# Altium PCB LEDSW.PcbDoc
Units mm, origin at the board's own origin, x right, y up, seen from the top; angles counter-clockwise.
Board outline 161.8 x 25.65 mm, 2 copper layers (Top Layer, Top, Bottom Layer, Bottom); 39 components, 23 nets, 73 pads, 0 vias.
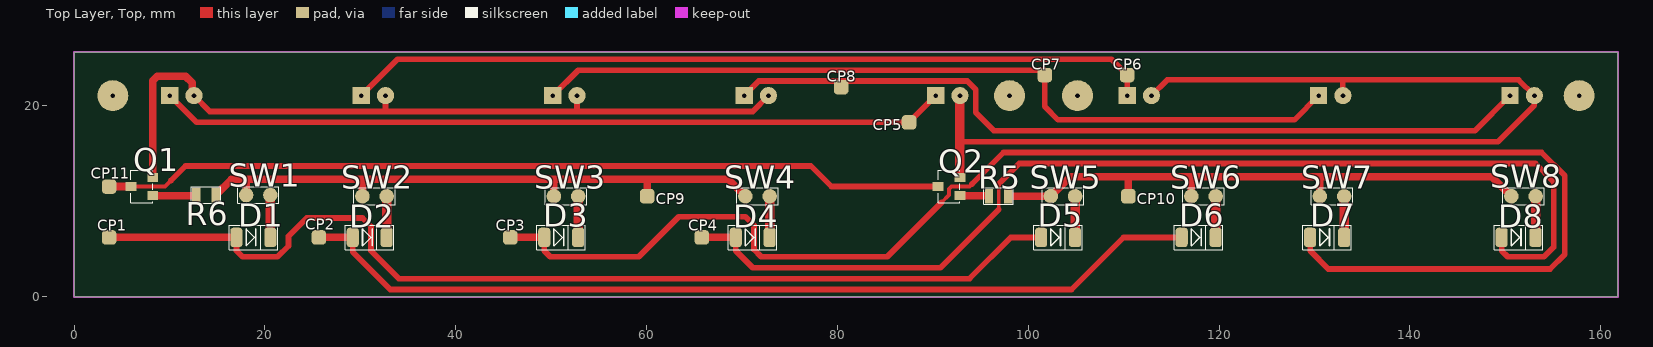
[diagram p0: Top Layer, Top view]
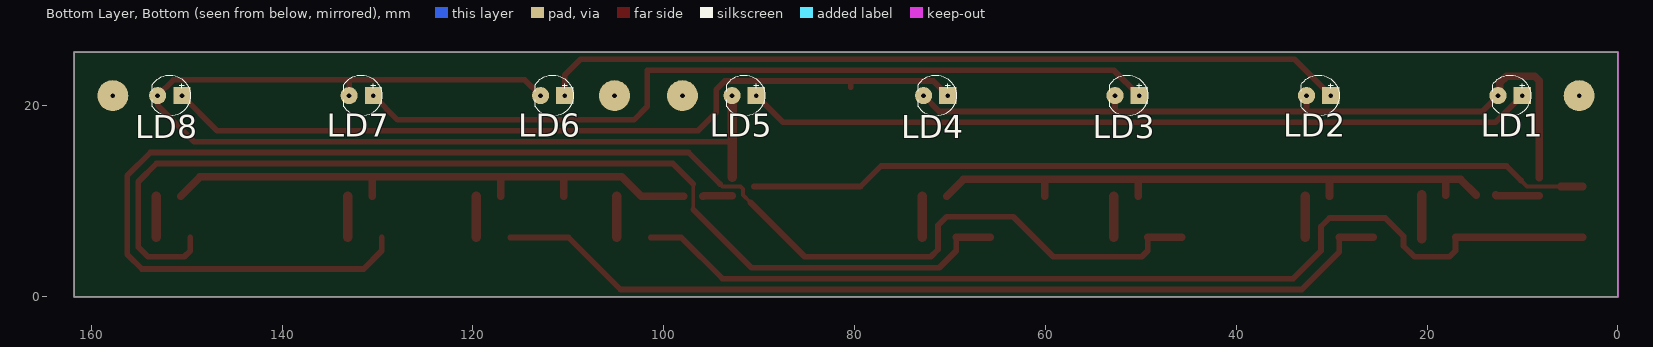
[diagram p1: Bottom Layer, Bottom view, seen from below]

## Layer stack, top to bottom
Top Solder, Top Mask: solder mask 0.0102, Solder Resist, Dk 3.5
Top Layer, Top: signal copper 0.0356
Dielectric 1: dielectric 0.32, FR-4, Dk 4.8
Bottom Layer, Bottom: signal copper 0.0356
Bottom Solder, Bot Mask: solder mask 0.0102, Solder Resist, Dk 3.5

## Board outline
0,0 161.798,0 161.798,25.654 0,25.654

## Design rules (kind name [scope] priority, off if disabled: settings)
Clearance "Clearance_Top Layer, Top" [ExistsOnLayer('Top Layer, Top') vs ExistsOnLayer('Top Layer, Top')] p1: gap=0.15 ignorepadtopadclearanceinfootprint=FALSE except(0.2: THPad-THPad)
Clearance [All] p2: gap=0.254 ignorepadtopadclearanceinfootprint=FALSE except(0: Arc-Hole Track-Hole SMDPad-Hole THPad-Hole Via-Hole Fill-Hole Poly-Hole Region-Hole Text-Hole; 0.15: THPad-THPad; 0.2: Arc-Arc Arc-Track Arc-THPad Arc-Via Track-Track Track-THPad Track-Via THPad-Via Via-Via)
HoleSize [All] p1: absolutevalues=TRUE maxlimit=5 minlimit=0.025 maxpercent=80.000 minpercent=20.000
MinimumSolderMaskSliver [All] p1: minsoldermaskwidth=0
PlaneClearance [All] p1: clearance=0.254
PolygonConnect [All] p1: connectstyle=Relief reliefconductorwidth=0.254 reliefentries=4 polygonreliefangle="90 Angle" airgapwidth=0.254
RoutingVias [All] p1: holewidth=0.711 width=1.27 viastyle="Through Hole" minholewidth=0.711 minwidth=1.27 maxholewidth=0.711 maxwidth=1.27
SilkToSilkClearance [All] p1: silktosilkclearance=0
SilkToSolderMaskClearance [IsPad] p1: minsilkscreentomaskgap=0 clearancetoexposedcopper=TRUE
SolderMaskExpansion [All] p1: expansion=0.102 istentingtop=FALSE
Width [All] p1: maxlimit=3 minlimit=0.254 preferedwidth=0.5
25 further rules are at their usual default settings.

## Components (designator, comment, footprint, x,y, rotation, side; value= is the part's Value field where it differs from the comment)
CP1 "R1" PAD_RRX60Y60D0T 3.683,6.223 r0 top
CP2 "R2" PAD_RRX60Y60D0T 25.654,6.223 r0 top
CP3 "R3" PAD_RRX60Y60D0T 45.72,6.223 r0 top
CP4 "R4" PAD_RRX60Y60D0T 65.786,6.223 r0 top
CP5 "SWL1" PAD_RRX60Y60D0T 87.503,18.288 r0 top
CP6 "SWL2" PAD_RRX60Y60D0T 110.363,23.241 r0 top
CP7 "SWL3" PAD_RRX60Y60D0T 101.727,23.241 r0 top
CP8 "SWL4" PAD_RRX60Y60D0T 80.391,21.971 r0 top
CP9 "C1" PAD_RRX60Y60D0T 60.071,10.541 r0 top
CP10 "C2" PAD_RRX60Y60D0T 110.49,10.541 r0 top
CP11 "GND" PAD_RRX60Y60D0T 3.683,11.557 r0 top
D1 "" SOD80_1N4148(Primary) 18.923,6.223 r0 top
D2 "" SOD80_1N4148(Primary) 31.115,6.223 r0 top
D3 "" SOD80_1N4148(Primary) 51.181,6.223 r0 top
D4 "" SOD80_1N4148(Primary) 71.247,6.223 r0 top
D5 "" SOD80_1N4148(Primary) 103.251,6.223 r0 top
D6 "" SOD80_1N4148(Primary) 117.983,6.223 r0 top
D7 "" SOD80_1N4148(Primary) 131.445,6.223 r0 top
D8 "" SOD80_1N4148(Primary) 151.511,6.223 r0 top
LD1 "" LED_3MM_DIP_LED_3MM(Primary) 11.303,21.082 r0 bottom locked
LD2 "" LED_3MM_DIP_LED_3MM(Primary) 31.369,21.082 r0 bottom locked
LD3 "" LED_3MM_DIP_LED_3MM(Primary) 51.435,21.082 r0 bottom locked
LD4 "" LED_3MM_DIP_LED_3MM(Primary) 71.501,21.082 r0 bottom locked
LD5 "" LED_3MM_DIP_LED_3MM(Primary) 91.567,21.082 r0 bottom locked
LD6 "" LED_3MM_DIP_LED_3MM(Primary) 111.633,21.082 r0 bottom locked
LD7 "" LED_3MM_DIP_LED_3MM(Primary) 131.699,21.082 r0 bottom locked
LD8 "" LED_3MM_DIP_LED_3MM(Primary) 151.765,21.082 r0 bottom locked
Q1 "" SOT23 7.112,11.557 r90 top
Q2 "" SOT23 91.694,11.557 r90 top
R5 "5.1K" R0805 96.901,10.541 r180 top
R6 "5.1K" R0805 13.843,10.668 r180 top
SW1 "" 2P:EX60Y60D0T-CD100 19.304,10.668 r180 top
SW2 "" 2P:EX60Y60D0T-CD100 31.496,10.541 r180 top
SW3 "" 2P:EX60Y60D0T-CD100 51.562,10.541 r180 top
SW4 "" 2P:EX60Y60D0T-CD100 71.628,10.541 r180 top
SW5 "" 2P:EX60Y60D0T-CD100 103.632,10.541 r180 top
SW6 "" 2P:EX60Y60D0T-CD100 118.364,10.541 r180 top
SW7 "" 2P:EX60Y60D0T-CD100 131.826,10.541 r180 top
SW8 "" 2P:EX60Y60D0T-CD100 151.892,10.541 r180 top

## Footprints (in the part's own frame and the unit in brackets; to place one, negate y for a bottom-side part, rotate by r counter-clockwise, add the part's x,y. Pads: shape width x height; smd on the part's side, far side on the other; paste and mask are expansions set on the pad)
2P:EX60Y60D0T-CD100 [mil]
  round 60 smd: 1(-50,0) 2(50,0)
  silkscreen extent -85,-35 85,35
LED_3MM_DIP_LED_3MM(Primary) [mm]
  rect 1.8x1.8 hole 0.5: A(-1.27,0)
  round 1.8 hole 0.5: K(1.27,0)
  silkscreen extent -2.16,-2.16 1.84,2.16
PAD_RRX60Y60D0T [mil]
  rrect50% 60x60 smd: 1(0,0)
R0805 [mil]
  rect 35x60 smd: 1(-40,0) 2(40,0)
  silkscreen extent -61,-34 61,34
SOD80_1N4148(Primary) [mil]
  rrect50% 50x80 smd: A(-75,0) K(65,0)
  silkscreen extent -105,-50 95,50
SOT23 [mil]
  rect 38x45 smd: 1(-37.5,-45) 2(37.5,-45) 3(0,45)
  silkscreen extent -68,-45 68,45

## Free pads (board coordinates)
  round 3.251 hole 0.5 unplated: 9(4.064,21.082) 9(98.044,21.082) 9(105.156,21.082) 9(157.734,21.082)

## Nets (pads, with @x,y where several pads share a name; then routed paths per layer and width w, separated by ;. In a path a pad name is that pad's centre, name@x,y a point inside that pad or via, vN(x,y) a via of type N, cw(c..) or ccw(c..) an arc to the next point about the centre after c; other vN are vias at no path point)
C1: CP9.1 R6.1 SW1.2 SW2.2 SW3.2 SW4.2 | length 63.9
  Top Layer, Top w0.8: R6.1 16.51,12.319 18.034,12.319 ; SW1.2 18.034,12.319 ; SW2.2 30.226,12.319 ; SW3.2 50.292,12.319 ; CP9.1 60.071,12.319 ; SW4.2 68.58,12.319 60.071,12.319 ; 18.034,12.319 30.226,12.319 ; 30.226,12.319 50.292,12.319 ; 50.292,12.319 60.071,12.319
C2: CP10.1 R5.1 SW5.2 SW6.2 SW7.2 SW8.2 | length 60.5
  Top Layer, Top w0.8: R5.1 SW5.2 104.394,12.573 110.49,12.573 ; CP10.1 110.49,12.573 ; SW6.2 117.094,12.573 ; SW7.2 130.556,12.573 ; SW8.2 148.59,12.573 130.556,12.573 ; 110.49,12.573 117.094,12.573 ; 117.094,12.573 130.556,12.573
CMN_LEDS1: LD1.K LD2.K LD3.K LD4.K Q1.2 | length 81
  Top Layer, Top w0.6: LD1.K 14.224,19.431 32.639,19.431 ; LD2.K 32.639,19.431 ; LD3.K 52.705,19.431 ; LD4.K 71.12,19.431 52.705,19.431 ; 32.639,19.431 52.705,19.431
  Top Layer, Top w0.8: Q1.2 8.255,22.645 8.724,23.114 11.684,23.114 12.382,22.416 12.382,21.273 LD1.K
CMN_LEDS2: LD5.K LD6.K LD7.K LD8.K Q2.2 | length 114.5
  Top Layer, Top w0.6: 92.837,16.256 149.225,16.256 153.035,20.066 LD8.K 151.384,22.733 132.969,22.733 ; LD6.K 114.554,22.733 132.969,22.733 ; LD7.K 132.969,22.733
  Top Layer, Top w1: Q2.2 92.837,16.256 LD5.K
GND: CP11.1 Q1.3 Q2.3 | length 88.7
  Top Layer, Top w0.4: Q1.3 9.525,11.557 10.16,12.192
  Top Layer, Top w0.6: 10.16,12.192 11.684,13.716 77.216,13.716 79.375,11.557 Q2.3
  Top Layer, Top w0.8: CP11.1 Q1.3
NET00051: Q2.1 R5.2 | length 3.1
  Top Layer, Top w0.8: Q2.1 95.822,10.604 R5.2
NET00053: Q1.1 R6.2 | length 4.6
  Top Layer, Top w0.8: Q1.1 12.763,10.604 R6.2
R1: CP1.1 D1.A D5.A | length 107.5
  Top Layer, Top w0.6: D1.A 17.018,4.826 17.653,4.191 21.336,4.191 22.479,5.334 22.479,6.35 24.384,8.255 30.226,8.255 31.115,7.366 31.115,4.826 34.036,1.905 93.853,1.905 98.171,6.223 D5.A
  Top Layer, Top w0.8: CP1.1 D1.A
R2: CP2.1 D2.A D6.A | length 95.8
  Top Layer, Top w0.6: D2.A 29.21,4.699 33.147,0.762 104.521,0.762 109.982,6.223 D6.A
  Top Layer, Top w0.8: CP2.1 D2.A
R3: CP3.1 D3.A D7.A | length 160.7
  Top Layer, Top w0.4: 90.932,9.906 91.694,10.668 91.694,11.303 91.948,11.557 93.853,11.557 94.107,11.811
  Top Layer, Top w0.6: D3.A 49.276,4.826 49.911,4.191 59.182,4.191 63.373,8.382 70.358,8.382 71.247,7.493 71.247,4.953 72.009,4.191 85.217,4.191 90.932,9.906 ; 94.107,11.811 97.409,15.113 153.797,15.113 156.21,12.7 156.21,4.445 154.686,2.921 131.445,2.921 129.54,4.826 D7.A
  Top Layer, Top w0.8: CP3.1 D3.A
R4: CP4.1 D4.A D8.A | length 112.7
  Top Layer, Top w0.4: 96.901,9.144 96.901,11.811
  Top Layer, Top w0.6: D4.A 69.342,4.826 71.12,3.048 90.805,3.048 96.901,9.144 ; 96.901,11.811 99.06,13.97 153.162,13.97 155.067,12.065 155.067,5.207 154.051,4.191 150.241,4.191 149.606,4.826 D8.A
  Top Layer, Top w0.8: CP4.1 D4.A
SW1: D1.K SW1.1 | length 4.6
  Top Layer, Top w1: D1.K@20.574,6.096 D1.K SW1.1
SW2: D2.K SW2.1 | length 4.3
  Top Layer, Top w1: D2.K 32.766,6.35 SW2.1
SW3: D3.K SW3.1 | length 4.3
  Top Layer, Top w1: D3.K SW3.1
SW4: D4.K SW4.1 | length 4.3
  Top Layer, Top w1: D4.K SW4.1
SW5: D5.K SW5.1 | length 4.3
  Top Layer, Top w1: D5.K SW5.1
SW6: D6.K SW6.1 | length 4.3
  Top Layer, Top w1: D6.K SW6.1
SW7: D7.K SW7.1 | length 4.3
  Top Layer, Top w1: D7.K SW7.1
SW8: D8.K SW8.1 | length 4.3
  Top Layer, Top w1: D8.K SW8.1
SWL1: CP5.1 LD1.A LD5.A | length 82.6
  Top Layer, Top w0.6: LD1.A 12.827,18.288 CP5.1 LD5.A
SWL2: CP6.1 LD2.A LD6.A | length 84.7
  Top Layer, Top w0.6: LD2.A 33.909,24.892 108.712,24.892 CP6.1 LD6.A
SWL3: CP7.1 LD3.A LD7.A | length 86.8
  Top Layer, Top w0.6: LD3.A 52.832,23.749 101.727,23.749 CP7.1 101.727,19.939 103.124,18.542 127.889,18.542 LD7.A
SWL4: CP8.1 LD4.A LD8.A | length 86.6
  Top Layer, Top w0.6: LD4.A 71.755,22.606 CP8.1@80.391,22.606 ; CP8.1 CP8.1@80.391,22.606 ; LD8.A 146.812,17.399 96.393,17.399 94.488,19.304 94.488,21.717 93.599,22.606 CP8.1@80.391,22.606

## Keep-outs
Keep-Out Layer, Board:
  lines w0.127: 0,0 161.798,0 161.798,25.654 0,25.654 0,0
  lines w0.2: 0,0 161.798,0 161.798,25.654 0,25.654 0,0